# Altium PCB QFN-30_L5.0-W5.0-P0.50-BL_XR76208XX.pcbdoc
Units mm, origin at the board's own origin, x right, y up, seen from the top; angles counter-clockwise.
Board outline 18.68 x 18.81 mm, 2 copper layers (Top Layer, Bottom Layer); 1 components, 0 nets, 34 pads, 0 vias.
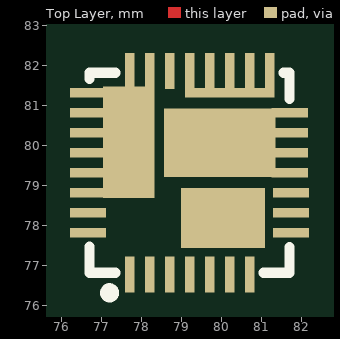
[diagram p0: Top Layer view]
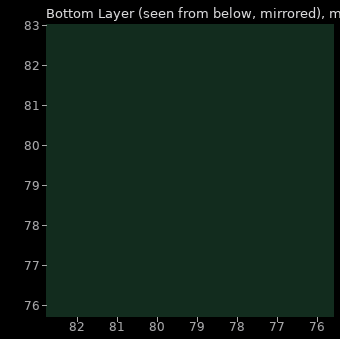
[diagram p1: Bottom Layer view, seen from below]

## Layer stack, top to bottom
Top Layer: signal copper (thickness not stored)
Dielectric: dielectric 0.32, FR-4, Dk 4.8
Bottom Layer: signal copper (thickness not stored)

## Board outline
88.53,69.85 69.85,69.85 69.85,88.66 88.53,88.66

## Design rules (kind name [scope] priority, off if disabled: settings)
Clearance safeClearance [All] p1: gap=0.178 ignorepadtopadclearanceinfootprint=FALSE except(0.152: Track-Track Track-SMDPad SMDPad-SMDPad Track-THPad SMDPad-THPad THPad-THPad Track-Via SMDPad-Via THPad-Via Via-Via Track-Fill SMDPad-Fill THPad-Fill Via-Fill Fill-Fill Track-Region SMDPad-Region THPad-Region Via-Region Fill-Region Region-Region Track-Poly SMDPad-Poly THPad-Poly Via-Poly Fill-Poly Region-Poly Poly-Poly Track-Text SMDPad-Text THPad-Text Via-Text Fill-Text Region-Text Poly-Text Text-Text; 0.175: Track-Hole SMDPad-Hole THPad-Hole Via-Hole Fill-Hole Region-Hole Poly-Hole Text-Hole Sheet-Hole; 0.3: Track-Sheet SMDPad-Sheet THPad-Sheet Via-Sheet Fill-Sheet Region-Sheet Poly-Sheet Text-Sheet)
DiffPairsRouting differentialPair [All] p1: maxuncoupledlength=10 minlimit=6 maxlimit=50 mostfreqgap=6 toplayer_minwidth=5 toplayer_prefwidth=10 toplayer_maxwidth=100 bottomlayer_minwidth=5 bottomlayer_prefwidth=10 bottomlayer_maxwidth=100
PasteMaskExpansion pasteMaskExpansion [All] p1:
PlaneConnect innerPlane [All] p1: planeconnectstyle=Relief reliefexpansion=0.508 reliefentries=4 reliefconductorwidth=0.254 reliefairgap=0.254
PolygonConnect copperRegion [All] p1: connectstyle=Relief reliefentries=4 reliefconductorwidth=10 polygonreliefangle="90 Angle" airgapwidth=10
RoutingVias viaSize [All] p1: viastyle="Through Hole" holewidth=12.0078 minholewidth=11.811 maxholewidth=236.2204 width=24.0158 minwidth=19.685 maxwidth=393.7008
SolderMaskExpansion solderMaskExpansion [All] p1: useseparateexpansions=TRUE expansion=2 expansionbottom=2
Width trackWidth [All] p1: maxlimit=100 minlimit=5 preferedwidth=10

## Components (designator, comment, footprint, x,y, rotation, side; value= is the part's Value field where it differs from the comment)
? "QFN-30_L5.0-W5.0-P0.50-BL_XR76208XX" QFN-30_L5.0-W5.0-P0.50-BL_XR76208XX 79.19,79.32 r0 top

## Footprints (in the part's own frame and the unit in brackets; to place one, negate y for a bottom-side part, rotate by r counter-clockwise, add the part's x,y. Pads: shape width x height; smd on the part's side, far side on the other; paste and mask are expansions set on the pad)
QFN-30_L5.0-W5.0-P0.50-BL_XR76208XX [mm]
  rect 0.24x0.9 smd: 1(-1.5,-2.54) 2(-1,-2.54) 3(-0.5,-2.54) 4(0,-2.54) 5(0.5,-2.54) 6(1,-2.54) 7(1.5,-2.54) 15(2,2.54) 16(1.5,2.54) 17(1,2.54) 18(0.5,2.54) 19(0,2.54) 20(-0.5,2.54) 21(-1,2.54) 22(-1.5,2.54)
  rect 0.9x0.24 smd: 8(2.54,-1.5) 9(2.54,-1) 10(2.54,-0.5) 23(-2.54,2) 24(-2.54,1.5) 25(-2.54,1) 26(-2.54,0.5) 27(-2.54,0) 28(-2.54,-0.5) 29(-2.54,-1) 30(-2.54,-1.5)
  rect 2.785x1.72 smd: 11(0.75,0.75)
  rect 0.916x0.24 smd: 11(2.5,0) 12(2.5,0.5) 13(2.5,1) 14(2.5,1.5)
  rect 2.24x0.24 smd: 15(1,2)
  rect 1.285x2.785 smd: 21(-1.52,0.76)
  rect 2.1x1.5 smd: 31(0.835,-1.135)
  silkscreen extent -2.5,-3.12 2.5,2.5

## Nets (pads, with @x,y where several pads share a name; then routed paths per layer and width w, separated by ;. In a path a pad name is that pad's centre, name@x,y a point inside that pad or via, vN(x,y) a via of type N, cw(c..) or ccw(c..) an arc to the next point about the centre after c; other vN are vias at no path point)
pads on no net: ?.1 ?.2 ?.3 ?.4 ?.5 ?.6 ?.7 ?.8 ?.9 ?.10 ?.11 ?.12 ?.13 ?.14 ?.15 ?.16 ?.17 ?.18 ?.19 ?.20 ?.21 ?.22 ?.23 ?.24 ?.25 ?.26 ?.27 ?.28 ?.29 ?.30 ?.31